# Altium PCB SIMA_PCB_2025.PcbDoc
Units mil, origin at the board's own origin, x right, y up, seen from the top; angles counter-clockwise.
Board outline 3700.79 x 2165.35 mil, 2 copper layers (Top Layer, Bottom Layer); 47 components, 37 nets, 183 pads, 117 vias.
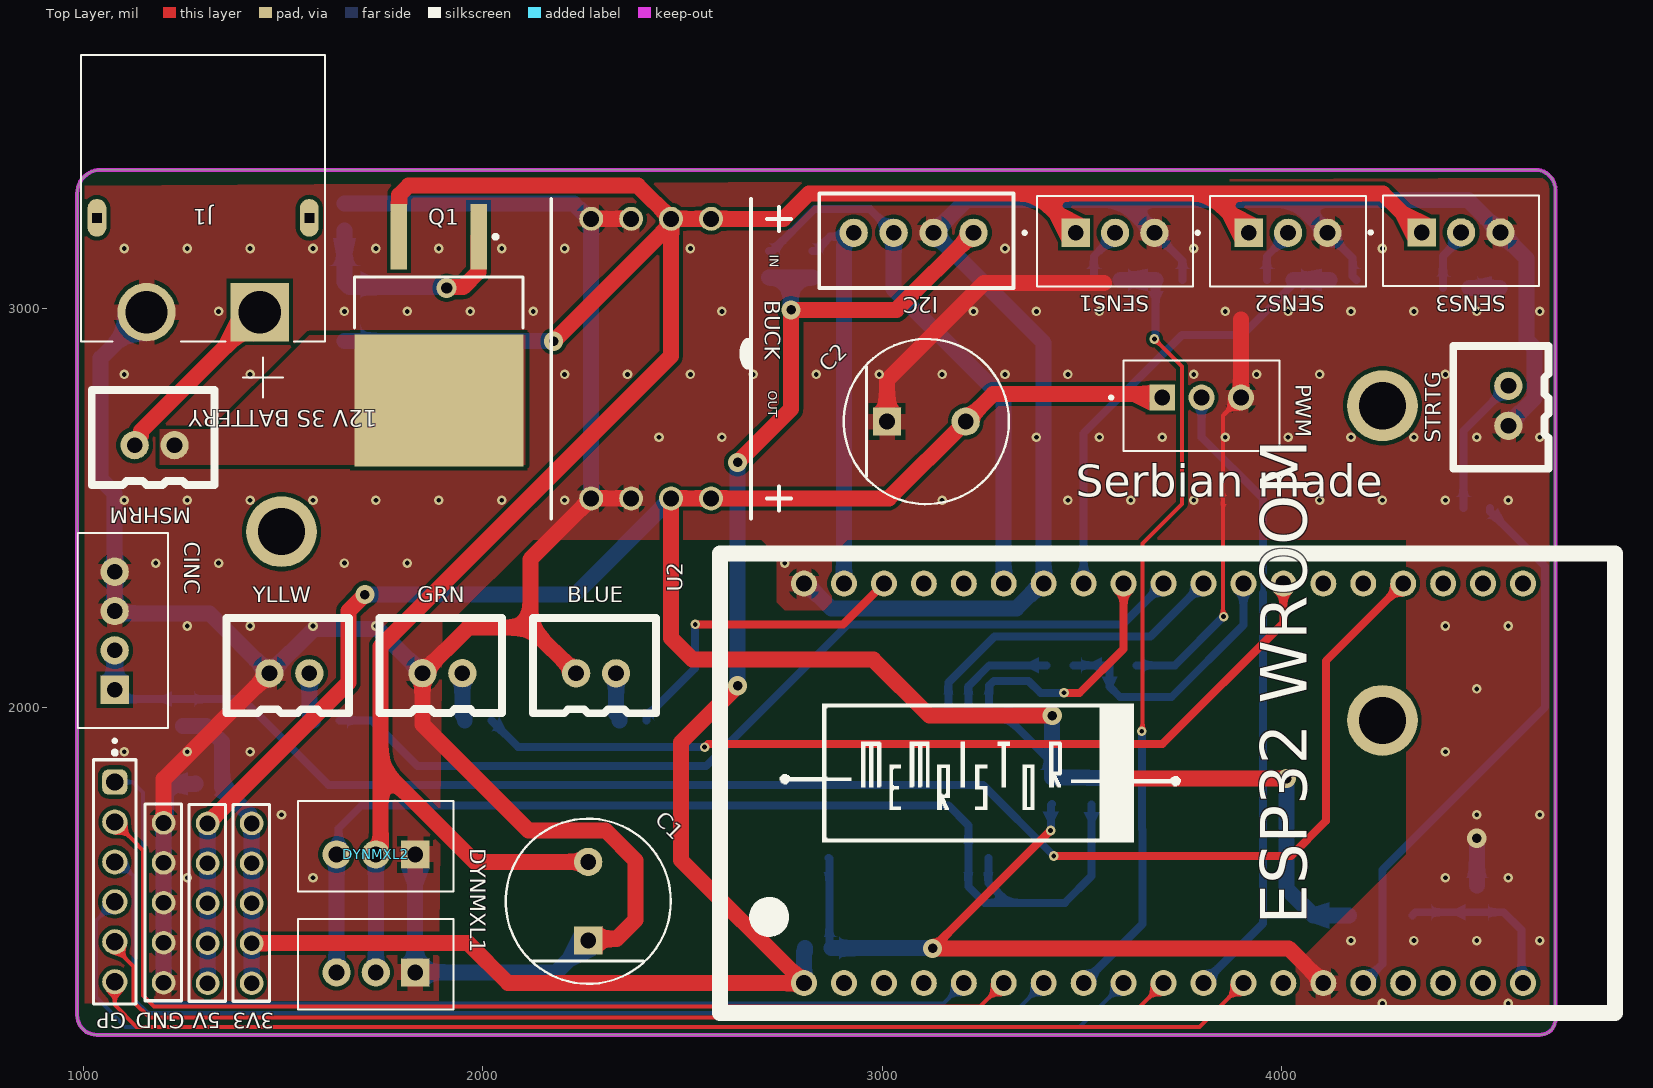
[diagram p0: Top Layer view]
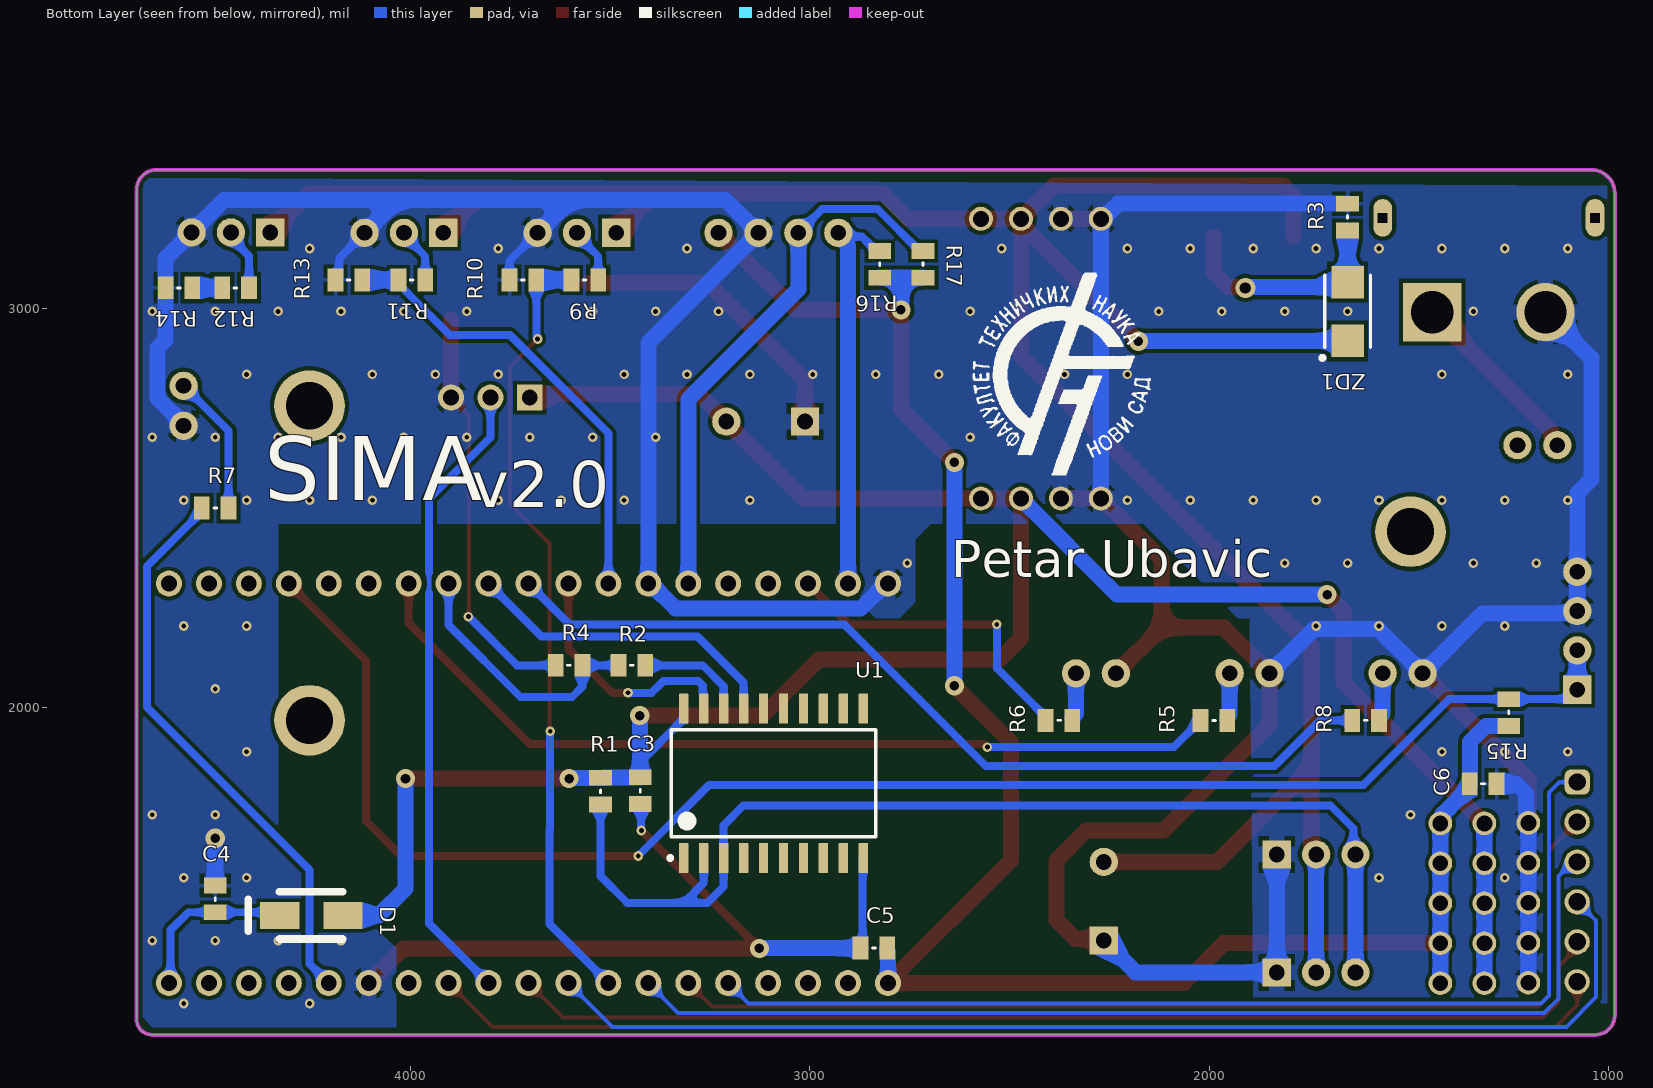
[diagram p1: Bottom Layer view, seen from below]
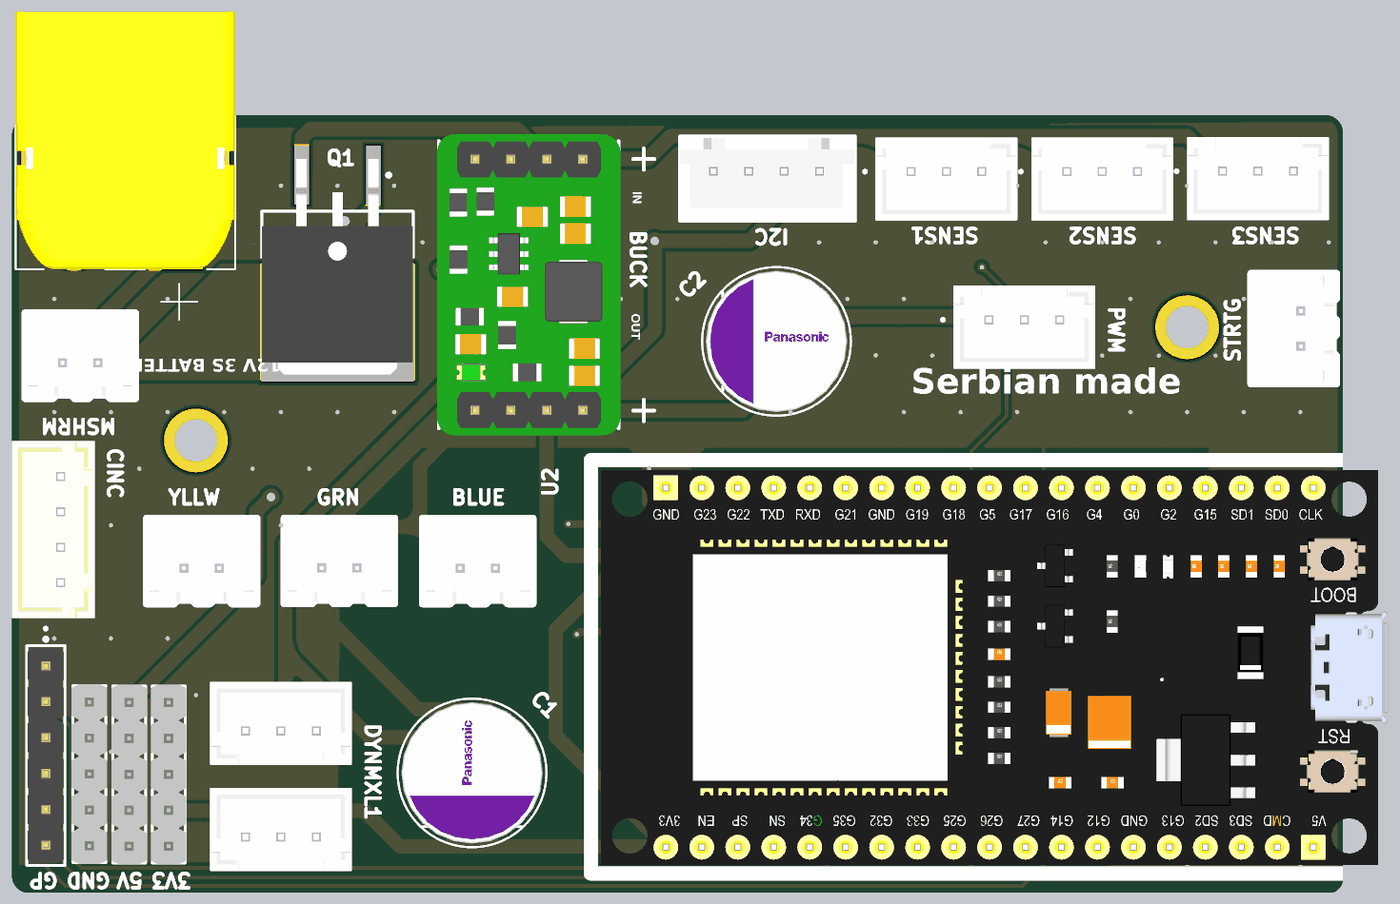
[diagram p2: 3D render of the assembled board from above, using the file's embedded part models]
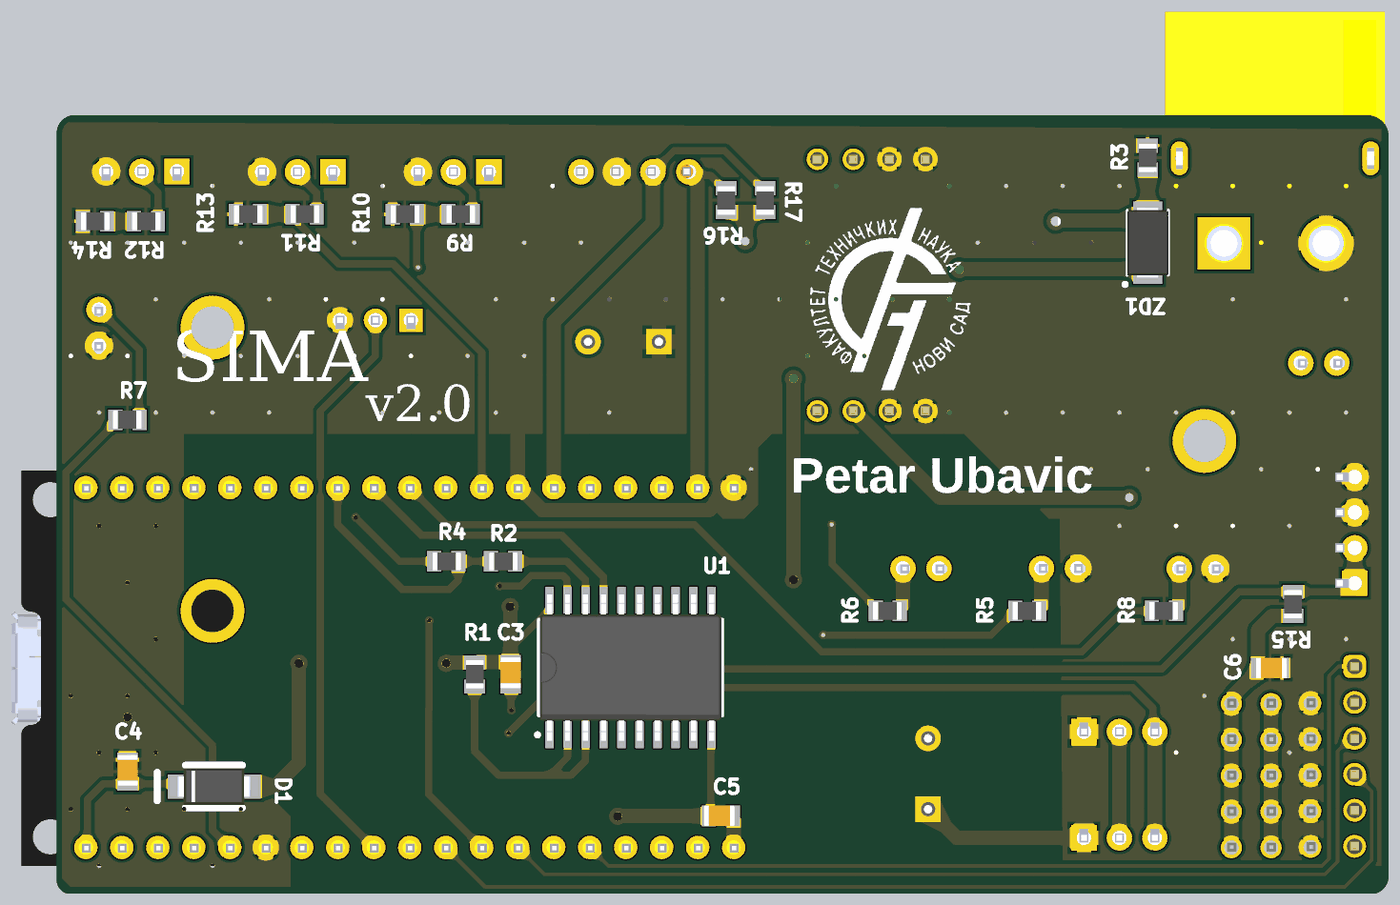
[diagram p3: 3D render of the assembled board from below, using the file's embedded part models]

## Layer stack, top to bottom
Top Solder: solder mask 0.4, Solder Resist, Dk 3.5
Top Layer: signal copper 1.4
Dielectric 1: dielectric 12.6, FR-4, Dk 4.8
Bottom Layer: signal copper 1.4
Bottom Solder: solder mask 0.4, Solder Resist, Dk 3.5

## Board outline
984.25,1231.1 984.25,3287.4 cw(c1043.31,3287.4) 1043.31,3346.46 4635.04,3346.46 cw(c4635.04,3296.46) 4685.04,3296.46 4685.04,1220.47 cw(c4645.67,1220.47) 4645.67,1181.1 1034.25,1181.1 cw(c1034.25,1231.1)

## Design rules (kind name [scope] priority, off if disabled: settings)
Clearance [All] p1: gap=10 ignorepadtopadclearanceinfootprint=FALSE
HoleSize [All] p1: absolutevalues=TRUE maxlimit=157.48 minlimit=0.98 maxpercent=80.000 minpercent=20.000
PlaneConnect [All] p1: pad.planeconnectstyle=Relief pad.reliefexpansion=20 pad.reliefentries=4 pad.reliefconductorwidth=40 pad.reliefairgap=10 via.planeconnectstyle=Direct via.reliefexpansion=20 via.reliefentries=4 via.reliefconductorwidth=10 via.reliefairgap=10
PolygonConnect PolygonConnect_7 [All vs IsNamedPolygon('GND')] p1: thpad.connectstyle=Relief thpad.reliefconductorwidth=40 thpad.reliefentries=4 thpad.polygonreliefangle="90 Angle" thpad.airgapwidth=10 smdpad.connectstyle=Relief smdpad.reliefconductorwidth=10 smdpad.reliefentries=4 smdpad.polygonreliefangle="90 Angle" smdpad.airgapwidth=10 via.connectstyle=Direct via.reliefconductorwidth=10 via.reliefentries=4 via.polygonreliefangle="90 Angle" via.airgapwidth=10
PolygonConnect PolygonConnect_6 [All vs IsNamedPolygon('GND')] p2: thpad.connectstyle=Relief thpad.reliefconductorwidth=10 thpad.reliefentries=4 thpad.polygonreliefangle="90 Angle" thpad.airgapwidth=10 smdpad.connectstyle=Relief smdpad.reliefconductorwidth=10 smdpad.reliefentries=4 smdpad.polygonreliefangle="90 Angle" smdpad.airgapwidth=10 via.connectstyle=Direct via.reliefconductorwidth=10 via.reliefentries=4 via.polygonreliefangle="90 Angle" via.airgapwidth=10
PolygonConnect GND_1 [All vs IsNamedPolygon('GND')] p3: thpad.connectstyle=Relief thpad.reliefconductorwidth=40 thpad.reliefentries=4 thpad.polygonreliefangle="90 Angle" thpad.airgapwidth=10 smdpad.connectstyle=Relief smdpad.reliefconductorwidth=10 smdpad.reliefentries=4 smdpad.polygonreliefangle="90 Angle" smdpad.airgapwidth=10 via.connectstyle=Relief via.reliefconductorwidth=10 via.reliefentries=4 via.polygonreliefangle="90 Angle" via.airgapwidth=10
PolygonConnect MSRHM [All vs IsNamedPolygon('MSHRM')] p4: thpad.connectstyle=Direct thpad.reliefconductorwidth=10 thpad.reliefentries=4 thpad.polygonreliefangle="90 Angle" thpad.airgapwidth=10 smdpad.connectstyle=Direct smdpad.reliefconductorwidth=10 smdpad.reliefentries=4 smdpad.polygonreliefangle="90 Angle" smdpad.airgapwidth=10 via.connectstyle=Relief via.reliefconductorwidth=10 via.reliefentries=4 via.polygonreliefangle="90 Angle" via.airgapwidth=10
PolygonConnect GND [All vs IsNamedPolygon('NONET_L03_P-001')] p5: thpad.connectstyle=Relief thpad.reliefconductorwidth=40 thpad.reliefentries=4 thpad.polygonreliefangle="90 Angle" thpad.airgapwidth=10 smdpad.connectstyle=Relief smdpad.reliefconductorwidth=10 smdpad.reliefentries=4 smdpad.polygonreliefangle="90 Angle" smdpad.airgapwidth=10 via.connectstyle=Relief via.reliefconductorwidth=10 via.reliefentries=4 via.polygonreliefangle="90 Angle" via.airgapwidth=10
PolygonConnect MSHRM [All vs IsNamedPolygon('NONET_L03_P-001')] p6: thpad.connectstyle=Direct thpad.reliefconductorwidth=10 thpad.reliefentries=4 thpad.polygonreliefangle="90 Angle" thpad.airgapwidth=10 smdpad.connectstyle=Direct smdpad.reliefconductorwidth=10 smdpad.reliefentries=4 smdpad.polygonreliefangle="90 Angle" smdpad.airgapwidth=10 via.connectstyle=Relief via.reliefconductorwidth=10 via.reliefentries=4 via.polygonreliefangle="90 Angle" via.airgapwidth=10
PolygonConnect PolygonConnect_5 [All vs InNet('GND')] p7: thpad.connectstyle=Relief thpad.reliefconductorwidth=50 thpad.reliefentries=4 thpad.polygonreliefangle="90 Angle" thpad.airgapwidth=10 smdpad.connectstyle=Relief smdpad.reliefconductorwidth=10 smdpad.reliefentries=4 smdpad.polygonreliefangle="90 Angle" smdpad.airgapwidth=10 via.connectstyle=Relief via.reliefconductorwidth=10 via.reliefentries=4 via.polygonreliefangle="90 Angle" via.airgapwidth=10
PolygonConnect PolygonConnect_4 [All vs IsNamedPolygon('NONET_L03_P-001')] p8: thpad.connectstyle=Relief thpad.reliefconductorwidth=50 thpad.reliefentries=4 thpad.polygonreliefangle="90 Angle" thpad.airgapwidth=10 smdpad.connectstyle=Relief smdpad.reliefconductorwidth=10 smdpad.reliefentries=4 smdpad.polygonreliefangle="90 Angle" smdpad.airgapwidth=10 via.connectstyle=Relief via.reliefconductorwidth=10 via.reliefentries=4 via.polygonreliefangle="90 Angle" via.airgapwidth=10
PolygonConnect PolygonConnect_3 [All vs IsNamedPolygon('NONET_L03_P-001')] p9: connectstyle=Relief reliefconductorwidth=10 reliefentries=4 polygonreliefangle="90 Angle" airgapwidth=10
PolygonConnect Pecurka [All vs IsNamedPolygon('NONET_L03_P-001')] p10: thpad.connectstyle=Direct thpad.reliefconductorwidth=10 thpad.reliefentries=4 thpad.polygonreliefangle="90 Angle" thpad.airgapwidth=10 smdpad.connectstyle=Direct smdpad.reliefconductorwidth=10 smdpad.reliefentries=4 smdpad.polygonreliefangle="90 Angle" smdpad.airgapwidth=10 via.connectstyle=Relief via.reliefconductorwidth=10 via.reliefentries=4 via.polygonreliefangle="90 Angle" via.airgapwidth=10
PolygonConnect PolygonConnect_2 [All vs IsNamedPolygon('NONET_L03_P-001')] p11: connectstyle=Relief reliefconductorwidth=10 reliefentries=4 polygonreliefangle="90 Angle" airgapwidth=10
PolygonConnect PolygonConnect_1 [All vs IsNamedPolygon('NONET_L03_P-001')] p12: thpad.connectstyle=Direct thpad.reliefconductorwidth=10 thpad.reliefentries=4 thpad.polygonreliefangle="90 Angle" thpad.airgapwidth=10 smdpad.connectstyle=Direct smdpad.reliefconductorwidth=10 smdpad.reliefentries=4 smdpad.polygonreliefangle="90 Angle" smdpad.airgapwidth=10 via.connectstyle=Relief via.reliefconductorwidth=10 via.reliefentries=4 via.polygonreliefangle="90 Angle" via.airgapwidth=10
PolygonConnect [All] p13: connectstyle=Relief reliefconductorwidth=10 reliefentries=4 polygonreliefangle="90 Angle" airgapwidth=10
RoutingVias [All] p1: holewidth=28 width=50 viastyle="Through Hole" minholewidth=28 minwidth=50 maxholewidth=28 maxwidth=50
SilkToSolderMaskClearance [IsPad] p1: minsilkscreentomaskgap=6 clearancetoexposedcopper=TRUE
SolderMaskExpansion [All] p1: expansion=4 istentingtop=FALSE
SupplyNets "Schematic Supply Nets_3" [InNet('+5')] p1: voltage=0.000
SupplyNets "Schematic Supply Nets_2" [InNet('GND')] p2: voltage=0.000
SupplyNets "Schematic Supply Nets_1" [InNet('+12')] p3: voltage=0.000
SupplyNets "Schematic Supply Nets" [InNet('3v3')] p4: voltage=0.000
Width [All] p1: maxlimit=40 minlimit=10 preferedwidth=20
27 further rules are at their usual default settings.

## Components (designator, comment, footprint, x,y, rotation, side; value= is the part's Value field where it differs from the comment)
3V3 "3v3" PIN_HEADER5 1421.26,1460.63 r180 top
5V "5V" PIN_HEADER5 1311.02,1460.63 r180 top
BLUE "BLUE" JST2PIN 2283.46,2106.3 r0 top
BUCK "MojBuckTPS" MOJBUCKTPS_HEADER 2421.26,2874.02 r270 top
C1 "330uF" FP-OS-CON-TH-F13-d_0_6-MFG 2263.78,1515.75 r90 top
C2 "25SEPF330M+T" FP-OS-CON-TH-F13-d_0_6-MFG 3110.24,2716.54 r0 top
C3 "100n" CAP_0805 3425.2,1791.34 r90 bottom
C4 "100n" CAP_0805 4489.13,1520.62 r90 bottom
C5 "100n" CAP_0805 2838.58,1397.64 r0 bottom
C6 "100n" CAP_0805 1314.96,1811.02 r180 bottom
CINC "4 PIN JST XH 2.5mm pitch" JST4PIN 1114.17,2192.91 r270 top
D1 "SCH_DIODE" SMA 4248.03,1480.32 r0 bottom
DYNMXL1 "B3B JST" JST3PIN#1 1732.28,1358.27 r0 top
DYNMXL2 "Molex" JST3PIN#1 1732.28,1653.54 r0 top
GND "GND1" PIN_HEADER5 1200.79,1461.81 r180 top
GP "61300611121" 61300611121 1078.74,1564.17 r270 top (schematic designator GPIO)
GRN "GRN" JST2PIN 1898.82,2106.61 r0 top
I2C "I2C" UltraSonic_Sensor 3078.35,3188.98 r270 top
J1 "XT60 90 Deg" XT60PW-M 1299.21,3307.09 r0 top
MSHRM "MSHRM" JST2PIN 1178.35,2677.48 r0 top
PWM "JST3PIN" JST3PIN#2 3799.21,2755.91 r180 top (schematic designator "PWM SERVO")
Q1 "IRF4905" DPAK254P1524X483-3N 1889.76,2933.07 r270 top
R1 "4.7k" RESISTOR_0805_SMALLSILK 3523.62,1791.34 r90 bottom
R2 "1k" RESISTOR_0805_SMALLSILK 3444.88,2106.3 r180 bottom
R3 "100k" RESISTOR_0805_SMALLSILK 1653.54,3228.35 r270 bottom
R4 "2k" RESISTOR_0805_SMALLSILK 3602.36,2106.3 r180 bottom
R5 "120" RESISTOR_0805_SMALLSILK 1988.19,1968.5 r0 bottom
R6 "120" RESISTOR_0805_SMALLSILK 2375.95,1968.57 r0 bottom
R7 "4k7" RESISTOR_0805_SMALLSILK 4488.19,2500 r0 bottom
R8 "120" RESISTOR_0805_SMALLSILK 1608.24,1968.57 r0 bottom
R9 "3k" RESISTOR_0805_SMALLSILK 3562.99,3070.87 r180 bottom
R10 "1k" RESISTOR_0805_SMALLSILK 3717.75,3070.87 r180 bottom
R11 "3k" RESISTOR_0805_SMALLSILK 3996.06,3070.87 r180 bottom
R12 "3k" RESISTOR_0805_SMALLSILK 4437.01,3051.18 r180 bottom
R13 "1k" RESISTOR_0805_SMALLSILK 4153.54,3070.87 r180 bottom
R14 "1k" RESISTOR_0805_SMALLSILK 4578.74,3051.18 r180 bottom
R15 "4.7k" RESISTOR_0805_SMALLSILK 1250,1988.19 r270 bottom
R16 "1k" RESISTOR_0805_SMALLSILK 2824.8,3110.24 r270 bottom
R17 "1k" RESISTOR_0805_SMALLSILK 2716.54,3110.24 r270 bottom
SENS1 "JST3PIN" JST3PIN#1 3582.68,3168.31 r180 top
SENS2 "JST3PIN" JST3PIN#1 4015.75,3168.31 r180 top
SENS3 "JST3PIN" JST3PIN#1 4448.82,3169.29 r180 top
STRTG "STRTG" JST2PIN 4547.24,2755.91 r90 top
U1 "SN74LS241DW" DW0020A_N 3090.55,1811.02 r90 bottom
U2 "ESP32WROOM_V2" ESP32WROOM 3503.94,1811.02 r90 top
YLLW "YLLW" JST2PIN 1515.75,2106.3 r0 top
ZD1 "10V" DIO_SMA 1653.54,2992.13 r90 bottom

## Footprints (in the part's own frame and the unit in brackets; to place one, negate y for a bottom-side part, rotate by r counter-clockwise, add the part's x,y. Pads: shape width x height; smd on the part's side, far side on the other; paste and mask are expansions set on the pad)
61300611121 [mm] "Pin Header, pitch 2.54 mm, THT, Vertical, single row, 6p"
  rrect50% 1.6x1.6 hole 1.1: 1(-6.35,0)
  round 1.6 hole 1.1: 2(-3.81,0) 3(-1.27,0) 4(1.27,0) 5(3.81,0) 6(6.35,0)
  silkscreen extent -8.34,-1.35 7.77,1.35, body extent -7.62,-1.27 7.62,1.27, height 8.57
CAP_0805 [mm]
  rect 1x1.45 smd mask+0.102: 1(-0.824,-0.024) 2(0.876,-0.024)
  silkscreen extent -0.08,-0.03 0.1,-0.03, body extent -0.97,-0.76 1.23,0.69, height 0.6
DIO_SMA [mm] "Molded Diode, 2-Leads, Body 4.30x2.70mm, IPC Medium Density"
  rect 2.07x2.06 smd: 1(-1.865,0) 2(1.865,0)
  silkscreen extent -3.07,-1.45 2.3,1.73, body extent -2.52,-1.45 2.52,1.45, height 2.44
DPAK254P1524X483-3N [mm] "D2-PAK, 3-Pads, Body 7.93x8.70mm (max), IPC Medium Density"
  rect 4.15x1.05 smd: 1(-6.25,2.54) 3(-6.25,-2.54)
  rect 8.4x10.75 smd: 4(4.15,0)
  silkscreen extent -6.37,-5.35 -0.45,5.35, body extent -7.41,-5.33 7.84,5.33, height 4.83
DW0020A_N [mm] "SOIC, 20-Leads, Body 13x7.6mm, Pitch 1.27mm, IPC Medium Density"
  rrect17% 1.9x0.6 smd: 1(-4.75,5.715) 2(-4.75,4.445) 3(-4.75,3.175) 4(-4.75,1.905) 5(-4.75,0.635) 6(-4.75,-0.635) 7(-4.75,-1.905) 8(-4.75,-3.175) 9(-4.75,-4.445) 10(-4.75,-5.715) 11(4.75,-5.715) 12(4.75,-4.445) 13(4.75,-3.175) 14(4.75,-1.905) 15(4.75,-0.635) 16(4.75,0.635) 17(4.75,1.905) 18(4.75,3.175) 19(4.75,4.445) 20(4.75,5.715)
  silkscreen extent -4.87,-6.5 3.4,6.69, body extent -5.16,-6.4 5.16,6.4, height 2.52
ESP32WROOM [mm]
  round 1.65 hole 1: 1(-12.7,17.78) 2(-12.7,15.24) 3(-12.7,12.7) 4(-12.7,10.16) 5(-12.7,7.62) 6(-12.7,5.08) 7(-12.7,2.54) 8(-12.7,0) 9(-12.7,-2.54) 10(-12.7,-5.08) 11(-12.7,-7.62) 12(-12.7,-10.16) 13(-12.7,-12.7) 14(-12.7,-15.24) 15(-12.7,-17.78) 16(-12.7,-20.32) 17(-12.7,-22.86) 18(-12.7,-25.4) 19(-12.7,-27.94) 20(12.7,-27.94) 21(12.7,-25.4) 22(12.7,-22.86) 23(12.7,-20.32) 24(12.7,-17.78) 25(12.7,-15.24) 26(12.7,-12.7) 27(12.7,-10.16) 28(12.7,-7.62) 29(12.7,-5.08) 30(12.7,-2.54) 31(12.7,0) 32(12.7,2.54) 33(12.7,5.08) 34(12.7,7.62) 35(12.7,10.16) 36(12.7,12.7) 37(12.7,15.24) 38(12.7,17.78)
  silkscreen extent -14.6,-33.78 14.61,23.11, body extent -14.02,-33.17 13.92,22.41, height 7.3
FP-OS-CON-TH-F13-d_0_6-MFG [mm]
  rect 1.8x1.8 hole 1 paste-2539.97 mask+0: 1(-2.5,0)
  round 1.8 hole 1 paste-2539.97 mask+0: 2(2.5,0)
  silkscreen extent -5.25,-5.25 5.25,5.25, body extent -5.35,-5.35 5.35,5.35, height 0.25
JST2PIN [mm]
  round 1.8 hole 1 mask+0.102: 1(-1.27,-0.508) 2(1.27,-0.508)
  silkscreen extent -4,-3.05 3.8,3, body extent -3.8,-2.88 3.6,2.88, height 7
JST3PIN#1 [mm]
  rect 1.8x1.8 hole 1: 1(2.5,-0.525)
  round 1.8 hole 1: 2(0,-0.525) 3(-2.5,-0.525)
  silkscreen extent -4.95,-2.88 4.95,2.88, body extent -4.95,-2.88 4.95,2.88, height 7
JST3PIN#2 [mm]
  rect 1.65x1.65 hole 1: 1(2.5,-0.525)
  round 1.65 hole 1: 2(0,-0.525) 3(-2.5,-0.525)
  silkscreen extent -4.95,-2.88 5.85,2.88, body extent -4.95,-2.88 4.95,2.88, height 7
JST4PIN [mm]
  rect 1.8x1.8 hole 1: 1(3.75,-0.906)
  round 1.8 hole 1: 2(1.25,-0.906) 3(-1.25,-0.906) 4(-3.75,-0.906)
  silkscreen extent -6.2,-3.26 7.1,2.49, body extent -6.2,-3.26 6.2,2.49, height 7
MOJBUCKTPS_HEADER [mil]
  round 60 hole 40: 1(-350,150) 2(-350,50) 3(-350,-50) 4(-350,-150) 5(350,-150) 6(350,-50) 7(350,50) 8(350,150)
  silkscreen extent -400,-250 400,350, body extent -419,-255 419,255, height 494
PIN_HEADER5 [mm]
  round 1.5 hole 1: 1(0,3.81) 2(0,1.27) 3(0,-1.27) 4(0,-3.81) 5(0,-6.35)
  silkscreen extent -1.15,-7.54 1.18,4.96, body extent -1.22,-7.65 1.28,5.05, height 9.45
RESISTOR_0805_SMALLSILK [mm]
  rect 1x1.45 smd mask+0.102: 1(-0.849,0.002) 2(0.851,0.002)
  silkscreen extent -0.1,0 0.08,0, body extent -0.97,-0.63 1.03,0.63, height 0.6
SMA [mm]
  rect 2.5x1.7 smd: 1(-2.032,0) 2(2,0)
  silkscreen extent -2,-1.5 4,1.5, body extent -2.6,-1.3 2.6,1.3, height 2.4
UltraSonic_Sensor [mm]
  round 1.8 hole 1: 1(0,3.81) 2(0,1.27) 3(0,-1.27) 4(0,-3.81)
  silkscreen extent -2.5,-6 3.5,6.35, body extent -2.37,-6.1 3.38,6.3, height 7
XT60PW-M [mm] "XT60 90 Deg"
  round 3.716 hole 2.7: 1(-3.584,-8.048)
  rect 3.716x3.716 hole 2.7: 2(3.616,-8.048)
  oval 1.2x2.4 hole 0.6 square: S1(6.766,-2.048) S2(-6.734,-2.048)
  silkscreen extent -7.73,-13.48 7.77,8.3, body extent -7.73,-9.9 7.77,8.3, height 8.4

## Part data
3V3: library part PIN_HEADER5, "5 pin header 100 mil"
5V GND: library part PIN_HEADER5, "5 pin header 100 mils"
BLUE GRN MSHRM STRTG YLLW: library part JST2PIN, "JST 2 Pin Connector"
C1: library part CMP-05428-000403-1, "Conductive Polymer Aluminum Solid Capacitors (OS-CON) 330uF ±20% 25V RADIAL TH 10x13mm", Case/Package=Radial, ESR (Equivalent Series Resistance)=14mR, Leakage Current=1.65mA, Max Operating Temperature=105°C, Min Operating Temperature=-55°C, Package Quantity=500, Ripple Current=5A, Tolerance=20%, Voltage=25V, capacitance=330uF, Construction=RADIAL, Diameter=10mm, Dissipation Factor=12%, Height - Seated (Max)=0.512inch, Lead Diameter=0.6mm, Lead Free="Lead Free", Lead Pitch=5mm, Length=13mm, Life (Hours)=5000Hour, Mount="Through Hole", Number of Pins=13, Packaging="Tape and Reel", Polarity=Polar, RoHS Compliant=Yes, Series="OS-CON, SEPF", Termination=Radial, Voltage Rating=25V, Voltage Rating (DC)=25V
C2: library part CMP-05428-000403-1, "Conductive Polymer Aluminum Solid Capacitors (OS-CON) 330uF ±20% 25V RADIAL TH 10x13mm", capacitance=330uF, Case/Package=Radial, ESR (Equivalent Series Resistance)=14mR, Leakage Current=1.65mA, Max Operating Temperature=105°C, Min Operating Temperature=-55°C, Package Quantity=500, Ripple Current=5A, Tolerance=20%, Voltage=25V, Construction=RADIAL, Diameter=10mm, Dissipation Factor=12%, Height - Seated (Max)=0.512inch, Lead Diameter=0.6mm, Lead Free="Lead Free", Lead Pitch=5mm, Length=13mm, Life (Hours)=5000Hour, Mount="Through Hole", Number of Pins=13, Packaging="Tape and Reel", Polarity=Polar, RoHS Compliant=Yes, Series="OS-CON, SEPF", Termination=Radial, Voltage Rating=25V, Voltage Rating (DC)=25V
C3 C4 C5 C6: library part C00079, "CAP 100nF ±10% 50V 0805 X7R", capacitance=100n
CINC: library part JST4PIN
DYNMXL1: library part JST3PIN, "ST B3B-EH-A 2.5mm pitch"
DYNMXL2: library part JST3PIN, "Molex 0022035035 2.5mm pitch"
GP: "WR-PHD Pin Header, THT, Vertical, pitch 2.54mm, 1 Row, 6P", Contact Resistance=20mOhm, Manufacturer="Wurth Elektronik", Operating Temperature Max=105°C, Operating Temperature Min=-40°C, Rated Current=3A, Withstanding Voltage=500V, Working Voltage=250V, Category="Board-to-Board Connectors", ComponentLink1Description="Website Link", ComponentLink1URL=https://www.we-online.com/redexpert/article/61300611121?ad, ComponentLink2Description="Datasheet Link", ComponentLink2URL=https://www.we-online.com/redexpert/spec/61300611121?ad, Gender="Pin Header", Manufacturer Part Number=61300611121, Match Code=WR-PHD, Mount="Through Hole", Number of Pins=6, Number of Rows=1, Orientation=Vertical, Packaging=Bag, Pitch=2.54mm
I2C: library part UltraSonic_Sensor, "Connector onaj beli"
J1: library part XT60PW-M
PWM SENS1 SENS2 SENS3: "3 PIN JST XH 2.5mm pitch"
Q1: Case/Package=D2PAK, Continuous Drain Current (ID)=75A, Current Rating=49A, Drain to Source Breakdown Voltage=40V, Drain to Source Resistance=4mR, Drain-source On Resistance-Max=3.7MR, Dual Supply Voltage=55V, Gate to Source Voltage (Vgs)=20V, Input Capacitance=4.34nF, Manufacturer="International Rectifier", Manufacturer Part Number=IRF1404ZSPBF, Max Operating Temperature=175°C, Max Power Dissipation=200W, Min Operating Temperature=-55°C, Package Quantity=50, Power Dissipation=220W, Threshold Voltage=4V, Category=MOSFETs, Drain to Source Voltage (Vdss)=40V, Element Configuration=Single, Fall Time=58ns, Height=4.83mm, Lead Free="Lead Free", Length=10.67mm, Mount="Surface Mount", Nominal Vgs=4V, Number of Elements=1, Number of Pins=3, On-State Resistance=3.7MR, Packaging=Rail/Tube, Polarity=N-CHANNEL, Radiation Hardening=No, Rds On Max=3.7mR, REACH SVHC="No SVHC", Recovery Time=42ns, Rise Time=110ns, RoHS Compliant=Yes, Series=HEXFET®, Termination=SMD/SMT, Turn-Off Delay Time=36ns, Turn-On Delay Time=18ns, Voltage Rating (DC)=55V, Width=9.65mm
R1 R15: library part R000116, "RES  4k7 OHM 1% 1/8W 0805", resistance=4.7k
R2 R10 R13 R14 R16 R17: library part R000004, "RES  1k OHM 1% 1/8W 0805", resistance=1k
R3: library part R000006, "RES  100k OHM 1% 1/8W 0805", resistance=100k
R4: library part R000053, "RES  2k OHM 1% 1/8W 0805", resistance=2k
R5 R6 R8: library part R000017, "RES  120 OHM 1% 1/8W 0805", resistance=120
R7: library part R000017, "RES  120 OHM 1% 1/8W 0805", resistance=120
R9 R11 R12: library part R000081, "RES  3k OHM 1% 1/8W 0805", resistance=3k
U1: library part CMP-0440-00100-3, "Octal Buffers And Line Drivers With 3-State Outputs, DW0020A, TUBE", F @ Nom Voltage(Max)(Mhz)=35, Generic Part Number=SN74LS241, ICC @ Nom Voltage(Max)(mA)=0.046, Manufacturer="Texas Instruments", Operating Temperature Range(C)="0 to 70", Rating=Catalog, tpd @ Nom Voltage(Max)(ns)=18, Voltage(Nom)(V)=5, Bits(#)=8, Code_JEDEC=MS-013, DatasheetVersion=SDLS144C, Input Type=TTL, Output Type=TTL, PackageReference=DW0020A, PackageVersion=http://www.ti.com/lit/ml/mpds173a/mpds173a.pdf, VCC(Max)(V)=5.25, VCC(Min)(V)=4.75
U2: "Pinout Acine ESP32 Wroom plocice, pinovi poslagani po redu"
ZD1: library part 1SMA5931-AU_R1, "Zener Diode 10 V 5 W ±5% Surface Mount SMC (DO-214AB)", ComponentLink1Description=digikey, ComponentLink1URL=https://www.digikey.com/en/products/detail/panjit-international-inc/1SMC5347-AU-R1-000A1/15799564

## Free pads (board coordinates)
  round 177.17 hole 118.11: MH1(1496.06,2440.94) MH2(4251.97,2755.91) MH3(4251.97,1968.5)

## Via types
v1: diameter 24, hole 12, Top Layer to Bottom Layer, tented both sides, 99 vias
v2: diameter 48, hole 24, Top Layer to Bottom Layer, 10 vias
v3: diameter 24, hole 12, Top Layer to Bottom Layer, 7 vias
v4: diameter 50, hole 28, Top Layer to Bottom Layer, tented both sides, 1 vias

## Nets (pads, with @x,y where several pads share a name; then routed paths per layer and width w, separated by ;. In a path a pad name is that pad's centre, name@x,y a point inside that pad or via, vN(x,y) a via of type N, cw(c..) or ccw(c..) an arc to the next point about the centre after c; other vN are vias at no path point)
3v3: 3V3.1 3V3.2 3V3.3 3V3.4 3V3.5 C5.1 C6.1 I2C.1 R15.2 R16.2 R17.2 U2.1 | length 4915.9
  Top Layer w40: 3V3.2 1963.39,1410.63 2062.99,1311.02 U2.1 2496.06,1618.9 2496.06,1913.39 v2(2637.8,2055.12) ; v2(2637.8,2614.17) 2771.65,2748.03 v2(2771.65,2996.06) 3035.43,2996.06 I2C.1
  Bottom Layer w40: R15.2 1307.09,1954.69 1347.39,1914.39 C6.1 1347.39,1801.86 1415.35,1733.9 1415.35,1716.54 3V3.5 3V3.4 3V3.3 3V3.2 3V3.1 3V3.1@1423.94,1313.32 ; v2(2637.8,2055.12) v2(2637.8,2614.17) ; R17.2 2770.61,3076.74 ; v2@2770.61,2997.11 2770.61,3076.74 ; U2.1 2803.94,1388.13 2806.15,1390.35 C5.1 ; R16.2 2770.61,3076.74
+5: 5V.1 5V.2 5V.3 5V.4 5V.5 BUCK.7 BUCK.8 C2.2 C3.2 D1.1 PWM.1 R1.2 U1.20 | length 6103
  Top Layer w40: 5V.5 1663.39,2062.99 1663.39,2242.13 v2(1704.72,2283.46) ; v2(3425.2,1980.32) 3118.11,1980.32 2977.76,2120.67 2525,2120.67 2471.26,2174.41 BUCK.7 BUCK.8 3016.14,2524.02 C2.2 3277.56,2785.43 3691.93,2785.43 PWM.1 ; v2(3602.36,1822.83) v2(4011.81,1822.83)
  Bottom Layer w20: U1.20 3315.55,1972.44 3422.16,1865.83
  Bottom Layer w40: 5V.1 5V.2 5V.3 5V.4 5V.5 ; v2(1704.72,2283.46) 2230.71,2283.46 BUCK.7 ; v2@3424.26,1979.38 C3.2 3514.46,1825.83 3515.46,1824.83 v2@3600.43,1824.83 ; v2(4011.81,1822.83) 4011.81,1547.24 4078.74,1480.32 D1.1
+12: BUCK.1 BUCK.2 C1.2 DYNMXL1.2 DYNMXL2.2 Q1.3 SENS1.1 SENS2.1 SENS3.1 ZD1.1 | length 6808.3
  Top Layer w40: DYNMXL2.2@1732.28,1641.23 1744.09,1653.04 1744.09,1850.39 ; Q1.3 1790.43,3179.8 1790.43,3283.66 1813.86,3307.09 2388.19,3307.09 BUCK.2 ; v2(2177.17,2917.32) 2461.26,3201.42 2461.26,3208.6 2471.26,3218.6 BUCK.2 ; C1.2 1980.32,1614.17 1744.09,1850.39 ; SENS1.1 3385.83,3287.4 ; SENS2.1 3818.9,3287.4 ; SENS3.1 4252.95,3287.4 3818.9,3287.4 ; 1744.09,1850.39 1744.09,2153.54 2471.26,2880.71 BUCK.2 ; BUCK.2 BUCK.1 2752.71,3224.02 2816.09,3287.4 3385.83,3287.4 ; 3385.83,3287.4 3818.9,3287.4
  Bottom Layer w40: ZD1.1 2175.79,2918.7 v2(2177.17,2917.32) ; DYNMXL1.2 DYNMXL2.2
BLUE: R6.2 U2.36 | length 805.6
  Top Layer w20: v1(2531.5,2208.66) 2901.57,2208.66 U2.36
  Bottom Layer w20: R6.2 2409.45,1977.36 2530.73,2098.64 2530.73,2207.9 v1(2531.5,2208.66)
CINC: CINC.1 CINC.2 R15.1 U2.23 | length 4002.4
  Top Layer w20: v3(3429.26,1629.06) 4022.76,1629.06 4110.24,1716.54 4110.24,2117.32 U2.23
  Bottom Layer w20: CINC.1@1082.68,2027.56 1088.61,2021.62 R15.1 1399.64,2021.62 1614.17,1807.09 3251.97,1807.09 3429.26,1629.8 v3(3429.26,1629.06)
  Bottom Layer w40: CINC.1 CINC.2
GND: BLUE.1 BUCK.3 BUCK.4 BUCK.5 BUCK.6 C1.1 C2.1 C3.1 C4.2 C5.2 C6.2 CINC.3 CINC.4 DYNMXL1.1 DYNMXL2.1 GND.1 GND.2 GND.3 GND.4 GND.5 GRN.1 I2C.2 J1.1 PWM.3 R3.1 R4.1 R10.1 R13.1 R14.1 SENS1.3 SENS2.3 SENS3.3 STRTG.1 U1.10 U2.14 U2.32 U2.38 YLLW.1 | length 15116.3
  Top Layer w10: v3(3854.33,2228.35) 3852.67,2230.01 3852.67,2731.61 PWM.3
  Top Layer w20: v2(3125.98,1397.64) v3(3421.26,1692.91)
  Top Layer w40: GND.5 1200.94,1711.97 1200.94,1821.5 YLLW.1 ; BLUE.1 2118.98,2200.79 ; C1.1 2268.17,1421.72 2335.1,1421.72 2381.89,1468.5 2381.89,1618.11 2307.09,1692.91 2114.17,1692.91 1848.82,1958.27 GRN.1 1962.99,2200.79 2118.98,2200.79 ; BUCK.4 BUCK.3 ; BUCK.6 BUCK.5 2118.98,2371.73 2118.98,2200.79 ; C2.1 3011.81,2820.47 3254.33,3062.99 3555.12,3062.99 ; v2(3125.98,1397.64) 4017.32,1397.64 U2.14 ; PWM.3 3897.64,2972.44
  Bottom Layer w20: U1.10 2867.36,1622.2 2867.36,1404.29 C5.2 ; v3@3422.03,1693.68 3422.03,1756.67 C3.1 ; R4.1 3732.35,2106.36 v3(3854.33,2228.35) ; SENS1.3 3751.18,3118.9 R10.1 ; SENS2.3 4177.29,3125.86 4177.29,3080.61 R13.1
  Bottom Layer w40: J1.1 1043.31,2875.43 1043.31,2572.23 1078.5,2537.03 CINC.4 CINC.3 1084.41,2236.22 1315.83,2236.22 YLLW.1 1576.3,2196.85 1738.58,2196.85 GRN.1 ; GND.1 GND.2 GND.3 GND.4 GND.5 1206.69,1717.72 1206.69,1785.43 1230.12,1808.86 1280.15,1808.86 1280.46,1809.18 C6.2 ; R3.1 2228.08,3261.78 2265.85,3224.02 BUCK.4 BUCK.5 ; DYNMXL2.1 DYNMXL1.1 2184.06,1337.6 C1.1 ; U2.38 2809.76,2311.02 2872.24,2248.54 3029.82,2248.54 3029.94,2248.66 3077.94,2248.66 3078.06,2248.54 3129.82,2248.54 3129.94,2248.66 3177.94,2248.66 3178.06,2248.54 3229.82,2248.54 3229.94,2248.66 3277.94,2248.66 3278.06,2248.54 3335.63,2248.54 3398.11,2311.02 U2.32 3403.94,2913.39 I2C.2 3211.02,3271.65 3598.43,3271.65 ; C5.2 v2@3125.05,1398.57 ; SENS1.3 3598.43,3271.65 ; SENS2.3 4031.5,3271.65 ; C4.2 v2(4488.19,1673.23) ; STRTG.1 4567.24,2710 4632.68,2775.44 4632.68,2900.5 4612.17,2921 R14.1 4612.17,3125.03 SENS3.3 4465.55,3271.65 4031.5,3271.65 ; 3598.43,3271.65 4031.5,3271.65
  other v1: 4251.97,1259.84 4566.93,1259.84 4173.23,1417.32 4330.71,1417.32 4488.19,1417.32 4645.67,1417.32 1259.84,1574.8 1574.8,1574.8 4409.45,1574.8 4566.93,1574.8 1496.06,1732.28 4488.19,1732.28 4645.67,1732.28 1102.36,1889.76 1259.84,1889.76 1417.32,1889.76 4409.45,1889.76 4488.19,2047.24 1259.84,2204.72 1417.32,2204.72 1574.8,2204.72 1732.28,2204.72 4409.45,2204.72 4566.93,2204.72 1181.1,2362.2 1338.58,2362.2 1653.54,2362.2 1811.02,2362.2 2755.91,2362.2 1102.36,2519.68 1259.84,2519.68 1417.32,2519.68 1574.8,2519.68 1732.28,2519.68 1889.76,2519.68 2047.24,2519.68 2204.72,2519.68 3149.61,2519.68 3464.57,2519.68 3622.05,2519.68 3779.53,2519.68 4094.49,2519.68 4251.97,2519.68 4409.45,2519.68 4566.93,2519.68 2440.94,2677.17 2598.42,2677.17 3385.83,2677.17 3543.31,2677.17 3700.79,2677.17 3858.27,2677.17 4015.75,2677.17 4173.23,2677.17 4330.71,2677.17 4488.19,2677.17 4645.67,2677.17 1102.36,2834.65 1417.32,2834.65 2204.72,2834.65 2362.2,2834.65 2519.68,2834.65 2677.17,2834.65 2834.65,2834.65 2992.13,2834.65 3149.61,2834.65 3307.09,2834.65 3464.57,2834.65 3779.53,2834.65 3937.01,2834.65 4094.49,2834.65 4409.45,2834.65 1338.58,2992.13 1653.54,2992.13 1811.02,2992.13 1968.5,2992.13 2125.98,2992.13 2598.42,2992.13 3228.35,2992.13 3385.83,2992.13 3543.31,2992.13 3858.27,2992.13 4015.75,2992.13 4173.23,2992.13 4330.71,2992.13 4488.19,2992.13 4645.67,2992.13 1102.36,3149.61 1259.84,3149.61 1417.32,3149.61 1574.8,3149.61 1732.28,3149.61 1889.76,3149.61 2047.24,3149.61 2204.72,3149.61 2519.68,3149.61 3307.09,3149.61 3779.53,3149.61 4251.97,3149.61
GP14: GP.6 U2.12 | length 2951.7
  Top Layer w10: GP.6 1078.74,1255.91 1133.54,1201.1 3794.02,1201.1 U2.12
GP25: GP.4 U2.9 | length 2907
  Bottom Layer w10: GP.4 1031.5,1466.93 1031.5,1275.59 1105.98,1201.1 3494.02,1201.1 U2.9
GP26: GP.5 U2.10 | length 2800.1
  Top Layer w10: GP.5 1078.74,1399.83 1125.98,1352.59 1125.98,1263.78 1165.35,1224.41 3617.32,1224.41 U2.10
GP32: GP.3 U2.7 | length 2692.6
  Bottom Layer w10: GP.3 1090.55,1614.17 1125.98,1578.74 1125.98,1271.65 1161.42,1236.22 3329.13,1236.22 U2.7
GP34: GP.1 U2.5 | length 2673.5
  Bottom Layer w10: GP.1 1122.83,1814.17 1149.61,1787.4 1149.61,1279.53 1169.29,1259.84 3152.76,1259.84 U2.5
GP35: GP.2 U2.6 | length 2654.2
  Top Layer w10: GP.2 1125.24,1667.68 1149.61,1643.31 1149.61,1279.53 1177.17,1251.97 3244.88,1251.97 U2.6
GRN: R5.2 U2.26 | length 2237.2
  Top Layer w20: v3(2555.12,1901.57) 2556.2,1901.57 2564.07,1909.45 3700.79,1909.45 4003.94,2212.6 U2.26
  Bottom Layer w20: R5.2 2088.55,1901.57 v3(2555.12,1901.57)
NetBLUE_2: BLUE.2 R6.1 | length 121.5
  Bottom Layer w40: BLUE.2 2333.46,1985.79 2342.52,1976.73 R6.1
NetC4_1: C4.1 D1.2 U2.19 | length 429
  Bottom Layer w20: D1.2 4334.65,1488.19 C4.1 4555.12,1488.19 4599.92,1443.39 4599.92,1315.04 U2.19
NetGRN_2: GRN.2 R5.1 | length 120.6
  Bottom Layer w40: GRN.2 1948.82,1982.61 1954.76,1976.67 R5.1
NetJ1_2: J1.2 MSHRM.1 | length 462.5
  Top Layer w40: MSHRM.1 1128.35,2665.83 1143.78,2681.27 1143.78,2692.44 J1.2
NetMSHRM_2: MSHRM.2 Q1.4
NetQ1_1: Q1.1 R3.2 ZD1.2 | length 575.5
  Top Layer w40: v4(1909.45,3051.18) 1911.36,3053.09 1950.73,3053.09 1989.09,3091.46 1989.09,3178.46 Q1.1
  Bottom Layer w40: R3.2@1653.51,3194.82 ZD1.2 1666,3053.09 1907.54,3053.09 v4(1909.45,3051.18)
NetR2_2: R2.2 U1.18 | length 273.6
  Bottom Layer w20: U1.18 3215.55,2054.13 3267.78,2106.36 R2.2
NetR7_1: R7.1 STRTG.2 | length 352.6
  Bottom Layer w20: R7.1 4454.76,2693.42 STRTG.2
NetR8_1: R8.1 YLLW.2 | length 121.5
  Bottom Layer w40: YLLW.2 1565.75,1985.79 1574.8,1976.73 R8.1
NetR9_2: R9.2 SENS1.2 | length 162.2
  Bottom Layer w20: R9.2 3529.5,3130.25 3582.68,3183.43 SENS1.2 SENS1.2@3582.68,3175.21
  Bottom Layer w40: SENS1.2@3582.68,3180.62 SENS1.2
NetR11_2: R11.2 SENS2.2 | length 140.1
  Bottom Layer w20: R11.2 3962.57,3130.25 4015.75,3183.43 SENS2.2
NetR12_2: R12.2 SENS3.2 | length 157.5
  Bottom Layer w20: R12.2 4403.51,3130.89 4448.82,3176.2 SENS3.2
PWM: PWM.2 U2.11 | length 1590.8
  Bottom Layer w10: 3952.76,2287.4 3952.76,2338.58
  Bottom Layer w20: PWM.2 3799.21,2677.17 3952.76,2523.62 3952.76,2338.58 ; U2.11 3952.76,1459.84 3952.76,2287.4
RXD: R2.1 R4.2 U2.27 | length 667.7
  Bottom Layer w20: R2.1 R4.2 3568.87,2053.18 3594.49,2027.56 3724.41,2027.56 3903.94,2207.09 U2.27
SCL: I2C.4 R16.1 U2.37 | length 1010.4
  Bottom Layer w20: R16.1 2833.6,3143.67 2869.17,3179.24 2918.61,3179.24 I2C.4
  Bottom Layer w40: U2.37 2903.94,3156.21 2928.35,3180.62 I2C.4
SDA: I2C.3 R17.1 U2.33 | length 1371.7
  Bottom Layer w20: R17.1 2725.33,3143.67 2829.69,3248.03 2969.29,3248.03 I2C.3
  Bottom Layer w40: I2C.3 3028.35,3047.92 3303.94,2772.33 U2.33
SENS1: R9.1 R10.2 U2.8 | length 1981.1
  Top Layer w10: v3(3649.61,1941.45) 3651.42,1943.26 3651.42,2411.26 3750,2509.84 3750,2854.33 v3(3681.1,2923.23)
  Bottom Layer w20: U2.8 3651.57,1458.66 3651.57,1694.34 3649.61,1696.31 v3(3649.61,1941.45) ; v3(3681.1,2923.23) 3681.1,2924.31 3684.25,2927.46 R10.2
  Bottom Layer w40: R9.1 R10.2
SENS2: R11.1 R13.2 U2.31 | length 1156.7
  Bottom Layer w20: U2.31 3503.94,2687.01 3750,2933.07 3901.22,2933.07 4004.68,3036.53 4004.68,3037.25 4029.5,3062.07 R11.1
  Bottom Layer w40: R11.1 R13.2
SENS3: R12.1 R14.2 | length 74.8
  Bottom Layer w40: R12.1 R14.2
SERVO_DATA: DYNMXL1.3 DYNMXL2.3 R1.1 U1.2 U1.3 | length 2801.8
  Bottom Layer w20: DYNMXL2.3 1639.25,1638.27 1639.25,1698.31 1696.85,1755.91 3165.35,1755.91 3215.55,1705.71 U1.3 3215.55,1552.17 3255.91,1511.81 3314.96,1511.81 ; U1.2 3265.55,1561.22 3314.96,1511.81 ; R1.1 3523.68,1578.8 3456.69,1511.81 3314.96,1511.81
  Bottom Layer w40: DYNMXL1.3 DYNMXL2.3
STRTG: R7.2 U2.15 | length 1434.6
  Bottom Layer w20: U2.15 4251.97,1359.06 4251.97,1594.49 4659.37,2001.89 4659.37,2353.39 4521.69,2491.08 R7.2
TXD: U1.17 U2.28 | length 806.2
  Bottom Layer w20: U1.17 3165.55,2063.19 3280.91,2178.54 3358.81,2178.54 3358.93,2178.66 3671.57,2178.66 U2.28
TXEN: U1.19 U2.30 | length 620.9
  Top Layer w20: v3(3454.72,2037.4) 3494.09,2037.4 3603.94,2147.24 U2.30
  Bottom Layer w20: U1.19 3267.36,1999.84 3267.36,2055.21 3279.08,2066.93 3366.14,2066.93 3395.67,2037.4 v3(3454.72,2037.4)
YLLW: R8.2 U2.29 | length 2299
  Bottom Layer w20: R8.2 1722.44,1968.5 1836.61,1854.33 2559.06,1854.33 2913.27,2208.54 3046.39,2208.54 3046.5,2208.66 3061.37,2208.66 3061.49,2208.54 3146.39,2208.54 3146.5,2208.66 3161.37,2208.66 3161.49,2208.54 3246.39,2208.54 3246.5,2208.66 3261.37,2208.66 3261.49,2208.54 3346.39,2208.54 3346.5,2208.66 3601.57,2208.66 U2.29
pads on no net: J1.S1 J1.S2 U1.1 U1.4 U1.5 U1.6 U1.7 U1.8 U1.9 U1.11 U1.12 U1.13 U1.14 U1.15 U1.16 U2.2 U2.3 U2.4 U2.13 U2.16 U2.17 U2.18 U2.20 U2.21 U2.22 U2.24 U2.25 U2.34 U2.35

## Polygon pours and split planes (outlines as drawn)
GND on Top Layer "GND" (solid, pour order 3): 4311.02,2421.26 4311.02,1633.86 4035.43,1358.27 4035.43,1220.47 4645.67,1220.47 4685.04,1259.84 4685.04,2421.26 4685.04,3327.09 1003.94,3307.09 1003.94,1259.84 1889.76,1259.84 1898.06,2224.34 1929.06,2224.34 2125.98,2421.26 2696.85,2421.26 2736.22,2381.89 2736.22,2263.78 2755.91,2244.09 2854.33,2244.09 2874.02,2263.78 2874.02,2381.89 2913.39,2421.26
NetMSHRM_2 on Top Layer "MSHRM" (solid, pour order 0): 1190.94,2647.64 1190.94,2608.27 2106.3,2608.27 2106.3,2933.07 1564.96,2933.07 1328.74,2696.85 1190.94,2696.85
GND on Bottom Layer "GND" (solid, pour order 1): 4330.71,2460.63 4330.71,1692.91 4035.43,1397.64 4035.43,1200.79 4645.67,1200.79 4685.04,1240.16 4685.04,2460.63 4685.04,3327.09 1003.94,3307.09 1003.94,1259.84 1889.76,1259.84 1898.06,2224.34 1929.06,2224.34 2165.35,2460.63 2696.85,2460.63 2736.22,2421.26 2736.22,2263.78 2775.59,2224.41 2834.65,2224.41 2834.65,2224.75 2873.68,2263.78 2873.68,2421.26 2913.39,2460.63

## Keep-outs
Keep-Out Layer:
  lines w10: 984.25,1231.1 ccw(c1034.25,1231.1) 1034.25,1181.1 4645.67,1181.1 ccw(c4645.67,1220.47) 4685.04,1220.47 4685.04,3020.87 4685.04,3296.46 ccw(c4635.04,3296.46) 4635.04,3346.46 1043.31,3346.46 ccw(c1043.31,3287.4) 984.25,3287.4 984.25,3020.87 984.25,1850.39 984.25,1231.1

## Silkscreen, mask and mechanical layers (free items; w line width, h text height)
Top Overlay:
  drawing of 10 lines, arcs and shapes, not listed
  text "12V 3S BATTERY" at 1736.23,2758.54 h70 r180
  text "Serbian made" at 3484.38,2501.6 h137.8
  text "ESP32 WROOM" at 4100.75,1457.48 h200 r90
Bottom Overlay:
  drawing of 32 lines, arcs and shapes, not listed
  text "SIMA" at 4365.79,2467.24 h275.59
  text "v2.0" at 3845.79,2464.18 h196.85
  text "Petar Ubavic" at 2645.67,2297.17 h157.48

## Text inside footprints (layer, text, board x,y; h text height)
BUCK: Top Overlay "IN" at 2711.26,3134.02 h39.37 r270; Top Overlay "OUT" at 2706.73,2794.02 h39.37 r270